# Altium PCB PCB.PcbDoc
Units mil, origin at the board's own origin, x right, y up, seen from the top; angles counter-clockwise.
Board outline 6000 x 4000 mil, 2 copper layers (Top Layer, Bottom Layer); 1 components, 0 nets, 7 pads, 0 vias.
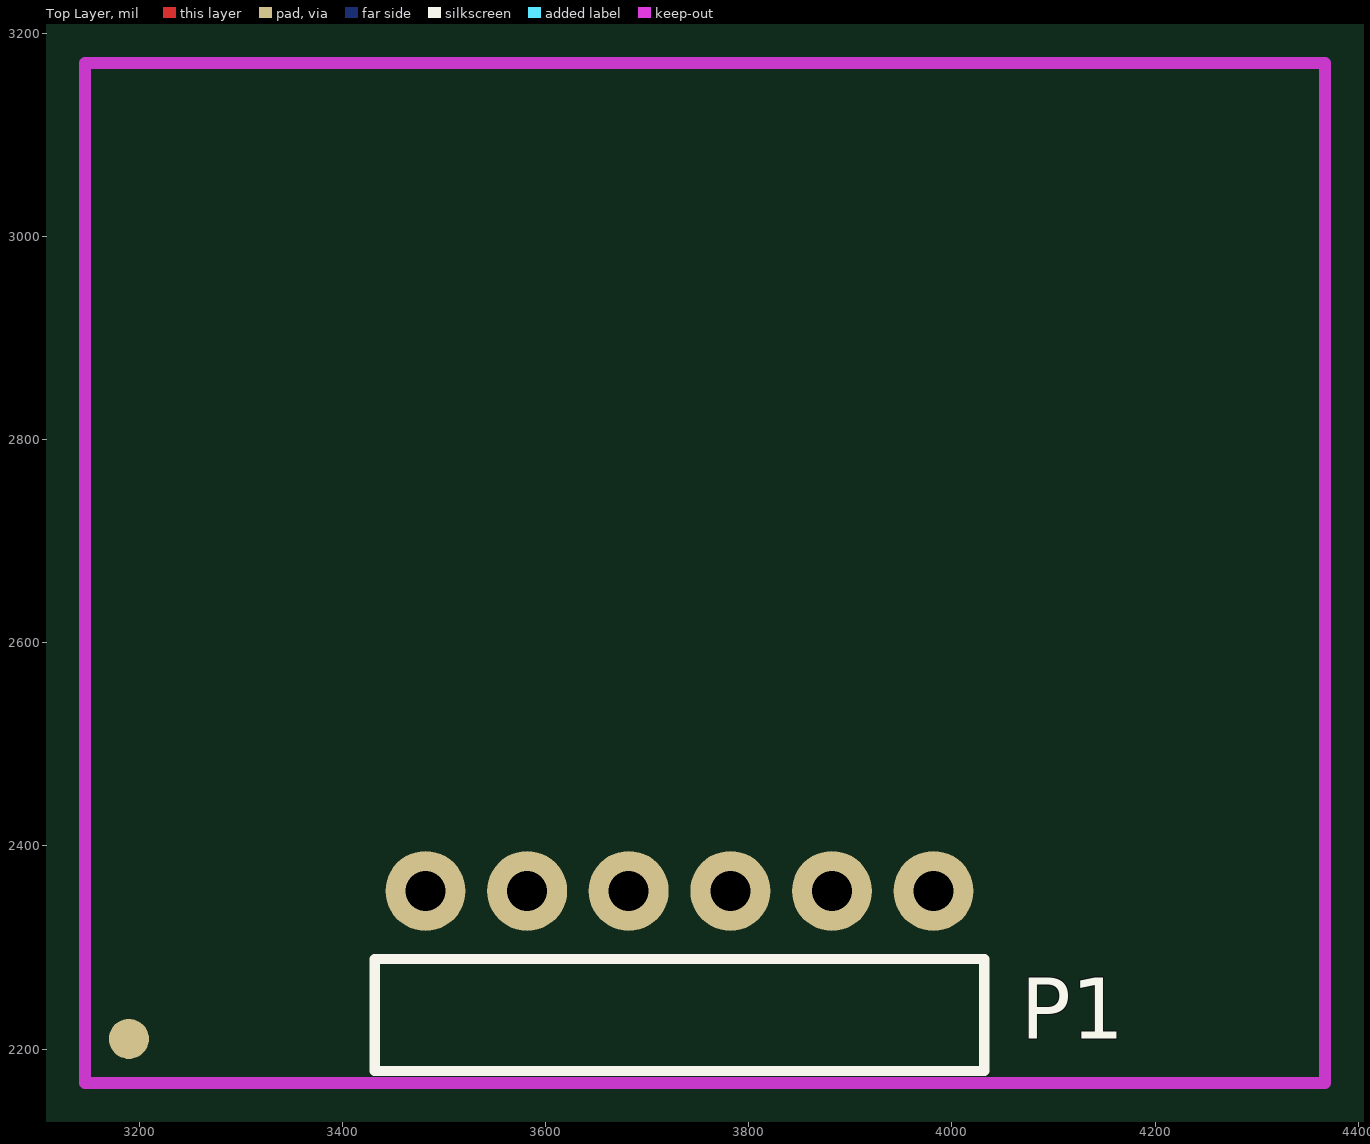
[diagram p0: Top Layer view]
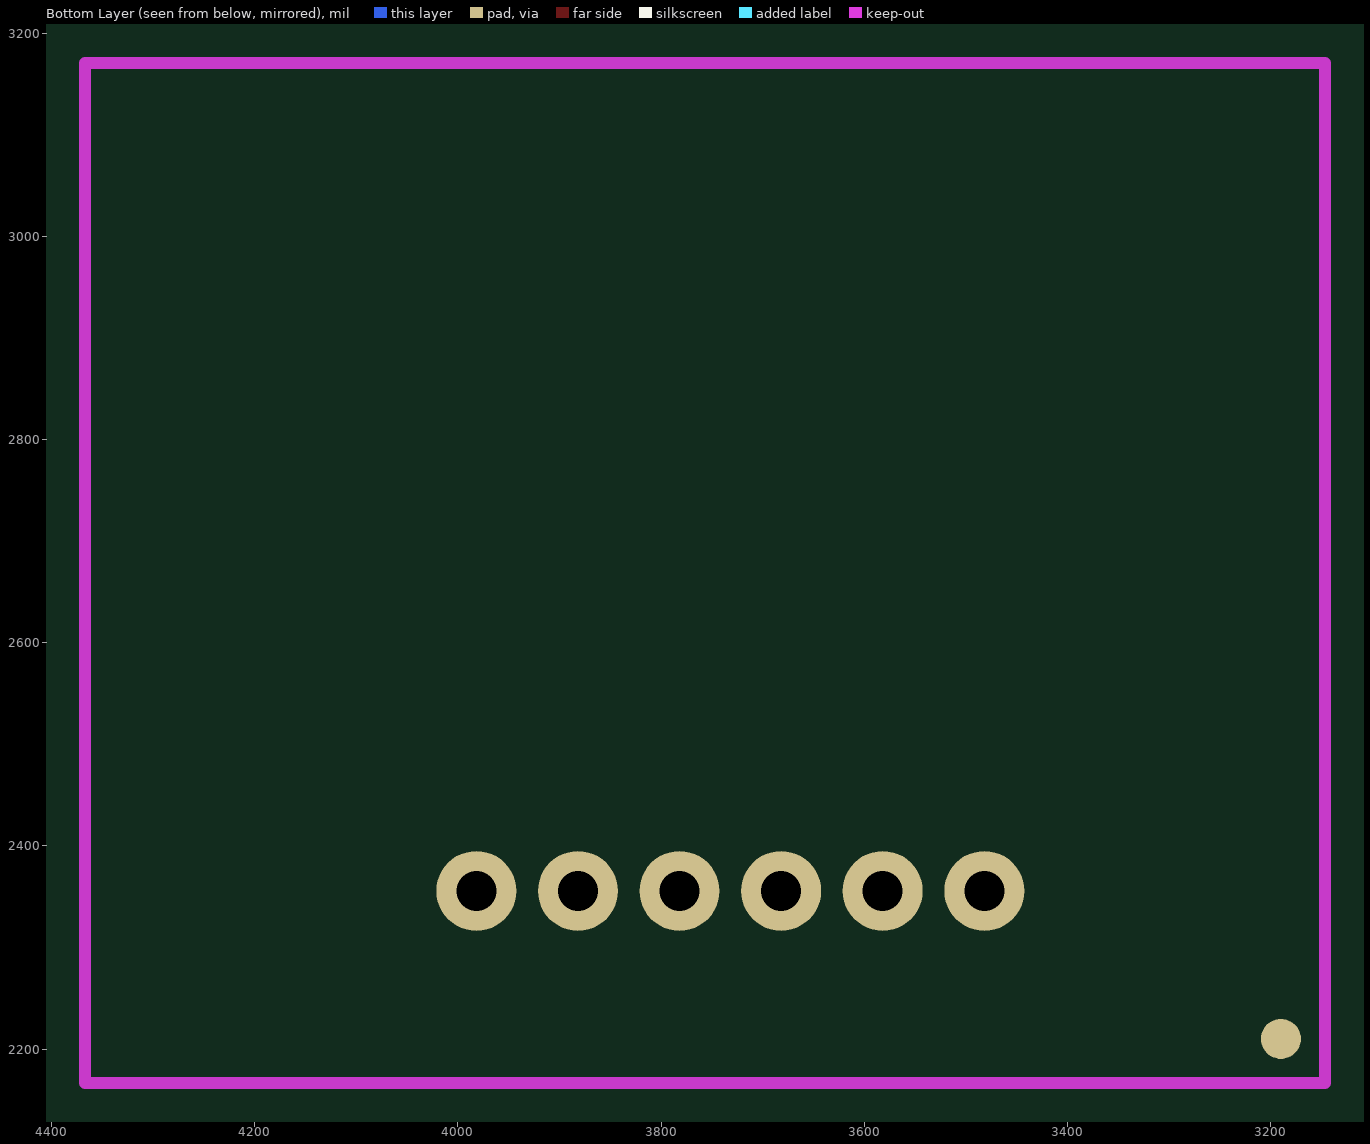
[diagram p1: Bottom Layer view, seen from below]

## Layer stack, top to bottom
Top Layer: signal copper 1.4
Dielectric: dielectric 12.6, FR-4, Dk 4.8
Bottom Layer: signal copper 1.4

## Board outline
1000,1000 7000,1000 7000,5000 1000,5000

## Design rules (kind name [scope] priority, off if disabled: settings)
Clearance [All] p1: gap=10
PolygonConnect [All] p1: connectstyle=Relief reliefconductorwidth=10 reliefentries=4 polygonreliefangle="90 Angle"
RoutingVias [All] p1: holewidth=28 width=50 viastyle="Through Hole" minholewidth=28 minwidth=50 maxholewidth=28 maxwidth=50
SilkscreenOverComponentPads [All] p1: minsilkscreentomaskgap=10
SolderMaskExpansion [All] p1: expansion=4
Width [All] p1: maxlimit=10 minlimit=10 preferedwidth=10
27 further rules are at their usual default settings.

## Components (designator, comment, footprint, x,y, rotation, side; value= is the part's Value field where it differs from the comment)
P1 "C6pin" C6PB 3731.93,2233.62 r0 top

## Footprints (in the part's own frame and the unit in brackets; to place one, negate y for a bottom-side part, rotate by r counter-clockwise, add the part's x,y. Pads: shape width x height; smd on the part's side, far side on the other; paste and mask are expansions set on the pad)
C6PB [mm]
  round 2 hole 1: 1(-6.35,3.1) 2(-3.81,3.1) 3(-1.27,3.1) 4(1.27,3.1) 5(3.81,3.1) 6(6.35,3.1)
  silkscreen extent -7.62,-1.4 7.62,1.4

## Part data
P1: "Conector 6 pines"

## Free pads (board coordinates)
  round 39.37 all layers, no hole: 0(3190,2210)

## Nets (pads, with @x,y where several pads share a name; then routed paths per layer and width w, separated by ;. In a path a pad name is that pad's centre, name@x,y a point inside that pad or via, vN(x,y) a via of type N, cw(c..) or ccw(c..) an arc to the next point about the centre after c; other vN are vias at no path point)
pads on no net: P1.1 P1.2 P1.3 P1.4 P1.5 P1.6

## Keep-outs
Keep-Out Layer:
  lines w11.5: 3146.69,2166.69 4367.17,2166.69 4367.17,3170.63 3146.69,3170.63 3146.69,2166.69

## Silkscreen, mask and mechanical layers (free items; w line width, h text height)
Mechanical 1:
  lines w31.5: 3146.69,2166.69 4367.17,2166.69 4367.17,3170.63 3146.69,3170.63 3146.69,2166.69